# Altium PCB PCF8563.PcbDoc
Units mil, origin at the board's own origin, x right, y up, seen from the top; angles counter-clockwise.
Board outline 1300 x 1305 mil, 2 copper layers (Top Layer, Bottom Layer); 17 components, 13 nets, 57 pads, 3 vias.
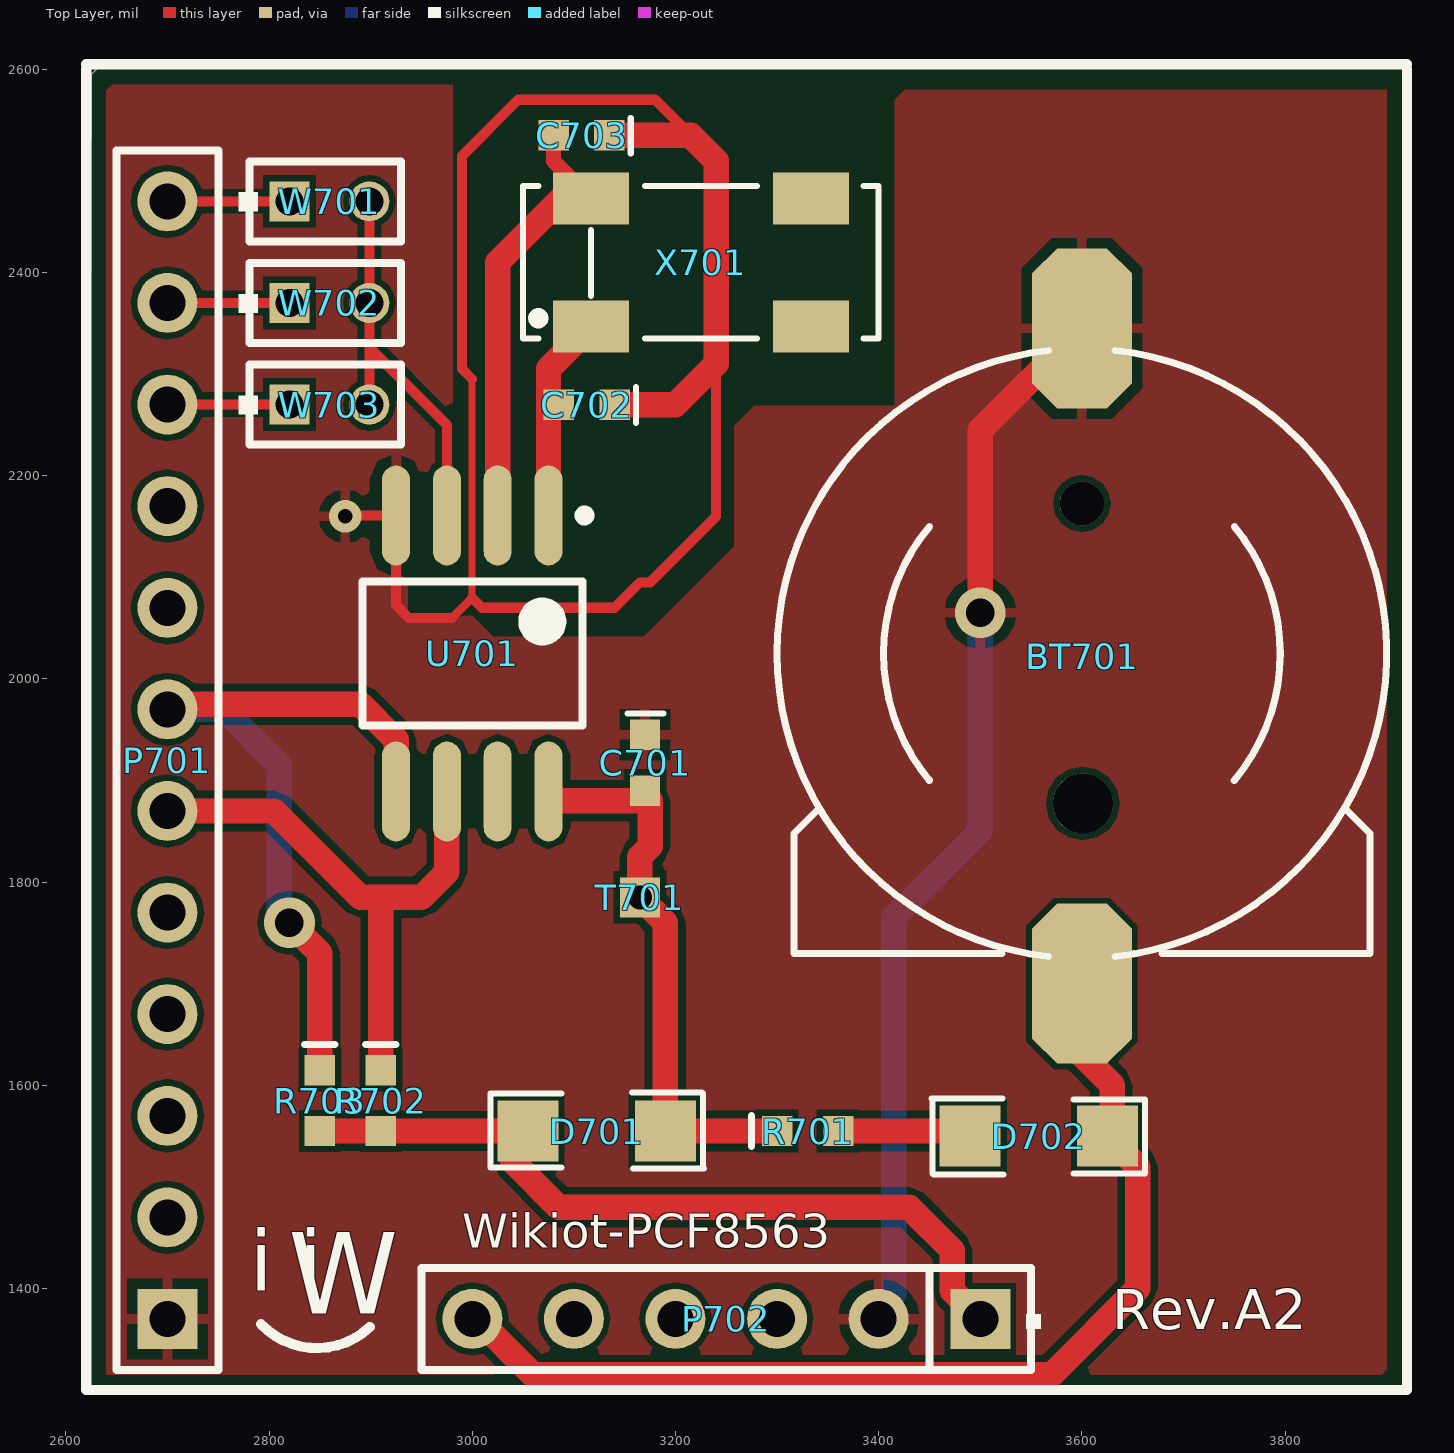
[diagram p0: Top Layer view]
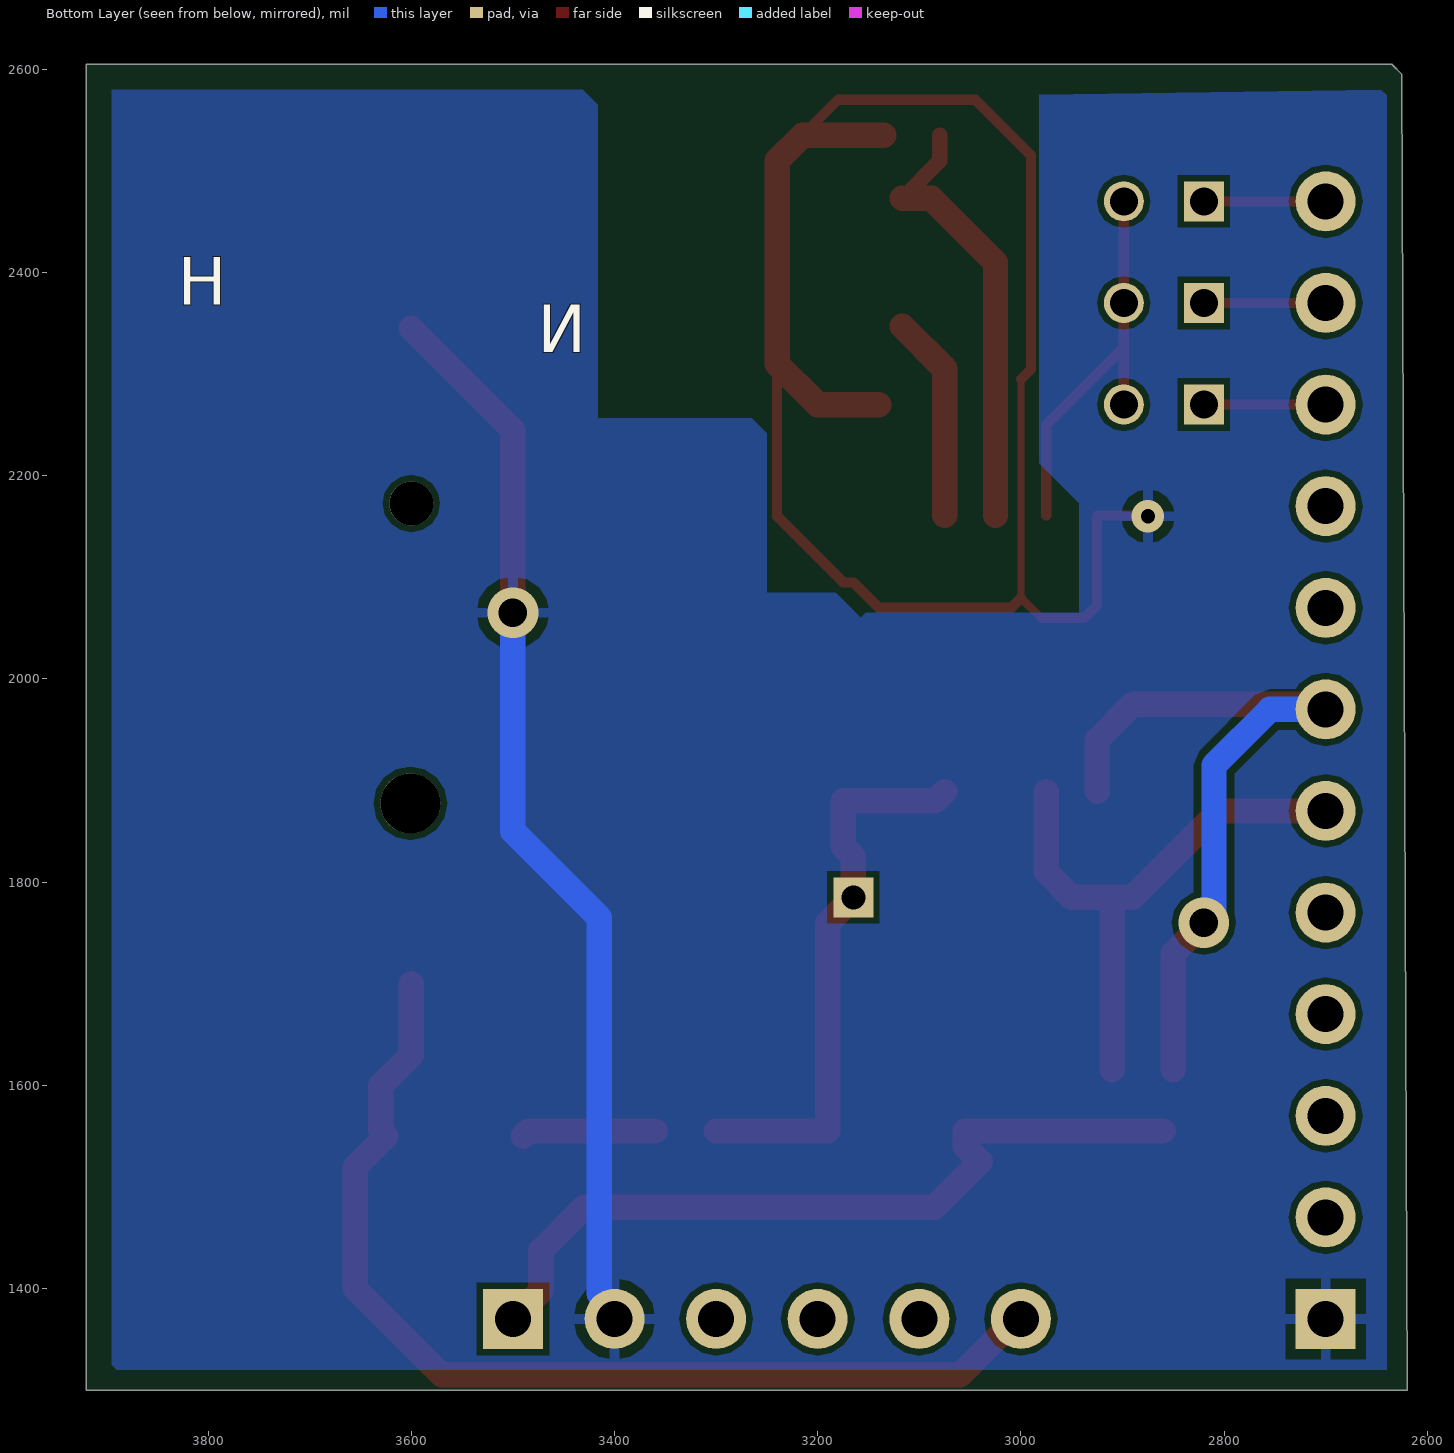
[diagram p1: Bottom Layer view, seen from below]

## Layer stack, top to bottom
Top Solder: solder mask 0.4, Solder Resist, Dk 3.5
Top Layer: signal copper 1.4
Dielectric1: dielectric 12.6, FR-4, Dk 4.8
Bottom Layer: signal copper 1.4
Bottom Solder: solder mask 0.4, Solder Resist, Dk 3.5

## Board outline
2625,2595 2635,2605 3920,2605 3920,1300 2620,1300

## Design rules (kind name [scope] priority, off if disabled: settings)
Clearance [All] p1: gap=6
PolygonConnect [All] p1: connectstyle=Relief reliefconductorwidth=10 reliefentries=4 polygonreliefangle="90 Angle" airgapwidth=10
RoomDefinition PCF8563 [InComponentClass('PCF8563')] p1: confinementstyle=ConfineIn formatcopy=TRUE lockcomponents=FALSE outline 2615,1290 3940,1290 3940,2610 2615,2610
RoutingVias [All] p1: holewidth=12 width=25 viastyle="Through Hole" minholewidth=12 minwidth=25 maxholewidth=28 maxwidth=50
SolderMaskExpansion [All] p1: expansion=4
Width [All] p1: maxlimit=55 minlimit=7 preferedwidth=10
29 further rules are at their usual default settings.

## Components (designator, comment, footprint, x,y, rotation, side; value= is the part's Value field where it differs from the comment)
BT701 "Battery" "BAT CR1220" 3600,2025 r270 top
C701 "0.1uF" 0603M 3170,1945 r270 top
C702 "22pF" 0603M 3140,2270 r180 top
C703 "NC" 0603M 3135,2535 r180 top
D701 "1N4148" 1206 3055,1555 r0 top
D702 "1N4148" 1206 3625,1550 r180 top
P701 "Synio Header-L 12-Pin" HDR1X12 2700,1370 r90 top
P702 "Synio Power Header 6 Pin" HDR1X6/2.54MM 3500,1370 r180 top
R701 "200" R0603 3330,1555 r0 top
R702 "3.3K" R0603 2910,1585 r270 top
R703 "3.3K" R0603 2850,1585 r270 top
T701 "TP" TP 3165,1785 r90 top
U701 "PCF8563" SO8W_M 3000,2025 r270 top
W701 "Jumper2-1" HDR1X2/2.00MM 2820,2470 r0 top
W702 "Jumper2-1" HDR1X2/2.00MM 2820,2370 r0 top
W703 "Jumper2-1" HDR1X2/2.00MM 2820,2270 r0 top
X701 "MC306-32.768-12.5pF-20PPM" SM8 3225,2410 r0 top

## Footprints (in the part's own frame and the unit in brackets; to place one, negate y for a bottom-side part, rotate by r counter-clockwise, add the part's x,y. Pads: shape width x height; smd on the part's side, far side on the other; paste and mask are expansions set on the pad)
0603M [mil]
  rect 30x30 smd: 1(0,0) 2(55,0)
  silkscreen extent -21,-17 -21,18, body extent -5,-15 60,15, height 43
1206 [mil]
  rect 60x60 smd: 1(0,0) 2(135,0)
  silkscreen extent -37,-37 173,38, body extent 15,-30 120,30, height 43
"BAT CR1220" [mm]
  round 1.1 hole 1.1 unplated: 0(-3.75,0)
  round 1.5 hole 1.5 unplated: 0(3.75,0.025)
  oct 4x2.5 smd: 1(8.255,0) 2(-8.128,0)
  silkscreen extent -7.57,-7.62 7.57,7.62
HDR1X2/2.00MM [mm] "Connector; Header; 2 Position"
  rect 1x1 hole 0.7: 1(0,0)
  round 1 hole 0.7: 2(2,0)
  silkscreen extent -1.27,-1 2.79,1
HDR1X6/2.54MM [mm] "Connector; Header; 6 Position"
  rect 1.5x1.5 hole 0.9: 1(0,0)
  round 1.5 hole 0.9: 2(2.54,0) 3(5.08,0) 4(7.62,0) 5(10.16,0) 6(12.7,0)
  silkscreen extent -1.52,-1.27 13.97,1.27
HDR1X12 [mm] "Connector; Header; 12 Position"
  rect 1.5x1.5 hole 0.9: 1(0,0)
  round 1.5 hole 0.9: 2(2.54,0) 3(5.08,0) 4(7.62,0) 5(10.16,0) 6(12.7,0) 7(15.24,0) 8(17.78,0) 9(20.32,0) 10(22.86,0) 11(25.4,0) 12(27.94,0)
  silkscreen extent -1.27,-1.27 29.21,1.27
R0603 [mil]
  rect 30x30 smd: 1(-30,0) 2(30,0)
  silkscreen extent -55,-15 -55,15, body extent -31,-16 32,15, height 18
SM8 [mm]
  rect 1.9x1.3 smd: 1(-2.75,-1.6) 2(2.75,-1.6) 3(2.75,1.6) 4(-2.75,1.6)
  silkscreen extent -4.44,-1.91 4.44,1.91
SO8W_M [mm] "8-Pin Small Outline Package 1.27 mm Pitch, IPC Low Density"
  oval 2.5x0.7 smd: 1(-3.45,1.905) 2(-3.45,0.635) 3(-3.45,-0.635) 4(-3.45,-1.905) 5(3.45,-1.905) 6(3.45,-0.635) 7(3.45,0.635) 8(3.45,1.905)
  silkscreen extent -3.57,-2.75 1.8,2.93, body extent -2.73,-2.75 2.73,2.75, height 2.13
TP [mm] "2.00MM Hole"
  rect 1x1 hole 0.6: 1(0,0)

## Part data
BT701: "Multicell Battery"
C701 C702 C703: library part Cap, "Capacitor"
D701 D702: library part "Diode 1N4007", "1 Amp General Purpose Rectifier"
P701: "Synio Header-L, 12-Pin"
R701 R702 R703: library part Res2, "Resistor"
T701: "Test Point"
U701: "Real Time Clock/Calendar"
W701 W702 W703: "Jumper Wire"
X701: library part MC306

## Via types
v1: diameter 50, hole 28, Top Layer to Bottom Layer, 2 vias
v2: diameter 32, hole 14, Top Layer to Bottom Layer, 1 vias

## Nets (pads, with @x,y where several pads share a name; then routed paths per layer and width w, separated by ;. In a path a pad name is that pad's centre, name@x,y a point inside that pad or via, vN(x,y) a via of type N, cw(c..) or ccw(c..) an arc to the next point about the centre after c; other vN are vias at no path point)
D3V3: D701.1 P702.1 R702.2 R703.2 | length 778.8
  Top Layer w25: R703.2@2860,1555 R702.2 D701.1 3055,1540 3040,1525 3085,1480 3430,1480 3472.5,1437.5 3472.5,1397.5 P702.1
GND: BT701.2 C701.1 C702.1 C703.1 P701.1 P702.2 U701.4 | length 3060.1
  Top Layer w7: 2999.78,2079.78 2999.78,2295.22
  Top Layer w8: 2980,2060 2999.78,2079.78
  Top Layer w10: v2@2870,2165 2874.17,2160.83 U701.4 2925,2072.61 2937.61,2060 2980,2060 ; 2999.78,2079.78 3009.56,2070 3140,2070 3165,2095 3175,2095 3240,2160 3240,2510 3180,2570 3045,2570 2990,2515 2990,2305 2999.78,2295.22
  Top Layer w25: C703.1 3215,2535 3240,2510 3240,2310 3200,2270 C702.1 ; v1(3500,2065) 3500,2245 BT701.2
  Bottom Layer w25: P702.2@3415,1395 3415,1765 3500,1850 v1(3500,2065)
  other v2: 2875,2160
NetC701_2: C701.2 D701.2 R701.1 T701.1 U701.8 | length 553.3
  Top Layer w25: U701.8 3084.17,1880 3175,1880 3175,1835 3165,1825 T701.1 3190,1760 D701.2 R701.1
NetC702_2: C702.2 U701.1 X701.1 | length 203.5
  Top Layer w25: U701.1 3075,2305.28 X701.1
NetC703_2: C703.2 U701.2 X701.4 | length 444.2
  Top Layer w15: C703.2 3080,2509.72 X701.4
  Top Layer w25: U701.2 3025,2410 3087.99,2472.99 X701.4
NetD702_2: D702.2 R701.2 | length 132.1
  Top Layer w25: R701.2 3485,1555 D702.2
NetP701_6: P701.6 R702.1 U701.6 | length 564.7
  Top Layer w25: P701.6 2805,1870 2890,1785 2950,1785 2975,1810 U701.6 ; R702.1 2910,1780
NetP701_7: P701.7 R703.1 U701.5 | length 719.7
  Top Layer w25: P701.7@2715,1975 2890,1975 2925,1940 U701.5 ; v1(2820,1760) 2850,1730 ; R703.1 2850,1725
  Bottom Layer w25: P701.7 2755,1970 2810,1915 2810,1770 v1(2820,1760)
NetP701_10: P701.10 W703.1 | length 120
  Top Layer w10: P701.10 W703.1
NetP701_11: P701.11 W702.1 | length 120
  Top Layer w10: P701.11 W702.1
NetP701_12: P701.12 W701.1 | length 110
  Top Layer w10: P701.12 W701.1@2810,2470
NetU701_3: U701.3 W701.2 W702.2 W703.2 | length 397
  Top Layer w10: W703.2 2898.74,2326.26 ; W701.2 W702.2 2898.74,2326.26 ; U701.3 2975,2250 2898.74,2326.26
VBAT: BT701.1 D702.1 P702.6 | length 1039.9
  Top Layer w25: P702.6 3005,1370 3060,1315 3570,1315 3655,1400 3655,1520 D702.1 3630,1555 3630,1600 3600,1630 BT701.1
pads on no net: BT701.0 P701.2 P701.3 P701.4 P701.5 P701.8 P701.9 P702.3 P702.4 P702.5 U701.7 X701.2 X701.3

## Polygon pours and split planes (outlines as drawn)
GND on Bottom Layer "Top Layer-GND" (solid, remove dead copper, pour order 28): 2644.88,2580 2640,2575.1 2640,1320 3890.12,1320 3895,1324.9 3895,2580 3431.09,2580 3426.21,2575.1 3416.44,2565.29 3416.44,2256.42 3265.06,2256.42 3250.41,2241.71 3250.41,2084.82 3182.04,2084.82 3157.63,2060.31 3152.74,2065.21 2942.76,2065.21 2942.76,2173.07 2981.83,2212.3 2981.83,2575.1
GND on Top Layer "Top Layer-GND" (solid, remove dead copper, pour order 34): 2635,2585 2639.94,2580.06 2639.94,1315 3895.06,1315 3900,1319.94 3900,2580.06 3425.63,2580.06 3415.74,2570.17 3415.74,2268.74 3277.38,2268.74 3267.5,2258.85 3257.62,2248.97 3257.62,2130.37 3203.26,2076.01 3168.67,2041.42 3025.37,2041.42 3020.43,2041.42 2995.72,2066.13 2990.78,2061.19 2936.43,2061.19 2936.43,2184.73 2971.02,2219.32 2980.9,2229.2 2980.9,2585

## Keep-outs
Keep-Out Layer:
  lines w10: 0,3905 3925,3905

## Silkscreen, mask and mechanical layers (free items; w line width, h text height)
Top Overlay:
  lines w10: 2620,2600 2620,1300 3920,1300 3920,2600 ; 2620,2605 3920,2605 ; 2792,1365 ccw(c2847,1417) 2899,1362
  text "Wikiot-PCF8563" at 2990,1440 h33.46
  text "i i" at 2781,1398 h60
  text "W" at 2819,1375 h80
  text "Rev.A2" at 3630,1360 h39.37
Bottom Overlay:
  text "H" at 3830,2353 h80
  text "N" at 3428,2306 h80